# Altium PCB PCB1.PcbDoc
Units mm, origin at the board's own origin, x right, y up, seen from the top; angles counter-clockwise.
Board outline 80 x 36 mm, 2 copper layers (Top Layer, Bottom Layer), stack 1.67 mm thick; 29 components, 29 nets, 124 pads, 103 vias.
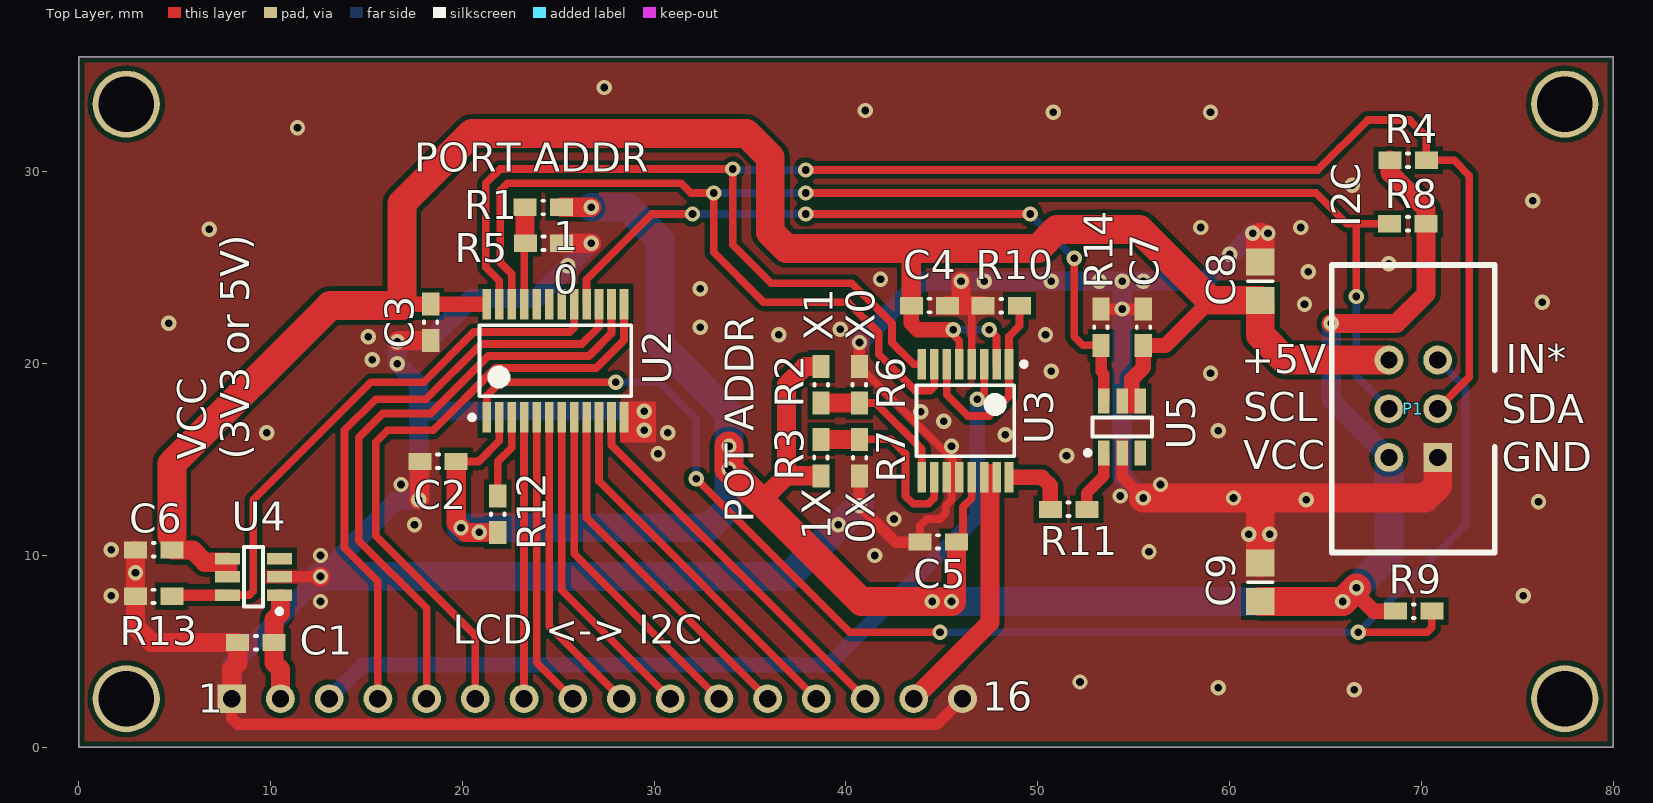
[diagram p0: Top Layer view]
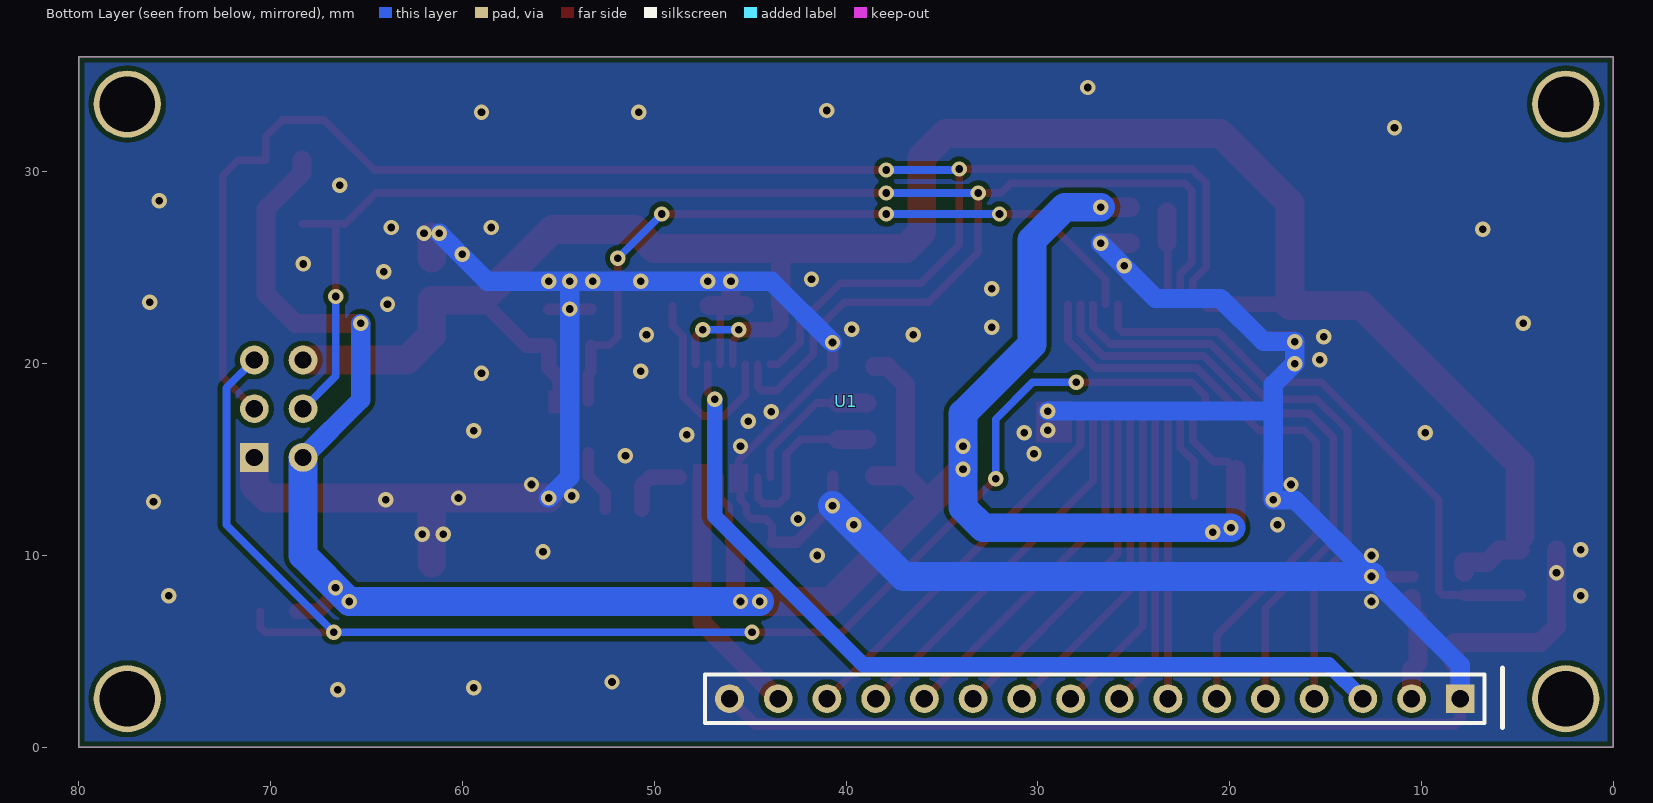
[diagram p1: Bottom Layer view, seen from below]

## Layer stack, top to bottom
Top Solder: solder mask 0.01, Solder Resist, Dk 3.5
Top Layer: signal copper 0.035
Dielectric 1: core 1.6, FR-4, Dk 4.2
Bottom Layer: signal copper 0.035
Bottom Solder: solder mask 0.01, Solder Resist, Dk 3.5

## Board outline
0,0 80,0 80,36 0,36

## Design rules (kind name [scope] priority, off if disabled: settings)
Clearance Clearance_1 [InNamedPolygon('GND_L01_P000') vs not InNet('GND')] p1: gap=0.254
Clearance Clearance_2 [InNamedPolygon('GND_L02_P001') vs not InNet('GND')] p2: gap=0.254
Clearance [All] p3: gap=0.178
DiffPairsRouting [All] p1: maxlimit=10 minlimit=0.178 mostfreqgap=0.5 toplayer_minwidth=0.178 toplayer_maxwidth=10 toplayer_prefwidth=0.5 bottomlayer_minwidth=0.178 bottomlayer_maxwidth=10 bottomlayer_prefwidth=0.5 maxuncoupledlength=12.7
HoleSize [All] p1: absolutevalues=TRUE maxlimit=10 minlimit=0.4 maxpercent=80.000 minpercent=20.000
HoleToHoleClearance [All] p1: gap=0 allowstackedmicrovias=TRUE
MinimumSolderMaskSliver [All] p1: minsoldermaskwidth=0
PlaneConnect [All] p1: planeconnectstyle=Direct reliefexpansion=0.508 reliefentries=4 reliefconductorwidth=0.254 reliefairgap=0.254
PolygonConnect [All] p1: connectstyle=Direct reliefconductorwidth=0.254 reliefentries=4 polygonreliefangle="90 Angle" airgapwidth=0.254
RoutingVias [All] p1: holewidth=1 width=2 viastyle="Through Hole" minholewidth=0.4 minwidth=0.8 maxholewidth=0.6 maxwidth=1.2
SilkToSilkClearance [All] p1: silktosilkclearance=0
SilkToSolderMaskClearance [IsPad] p1: minsilkscreentomaskgap=0 clearancetoexposedcopper=FALSE
SolderMaskExpansion [All] p1: expansion=0.1
Width [All] p1: maxlimit=10 minlimit=0.203 preferedwidth=0.5
23 further rules are at their usual default settings.

## Components (designator, comment, footprint, x,y, rotation, side; value= is the part's Value field where it differs from the comment)
C1 "0603" 0603_HandSoldering 9.24,5.459 r0 top locked
C2 "0603" 0603_HandSoldering 18.725,14.9 r180 top locked
C3 "0603" 0603_HandSoldering 18.35,22.15 r270 top locked
C4 "0603" 0603_HandSoldering 44.35,23.025 r180 top locked
C5 "0603" 0603_HandSoldering 44.8,10.7 r180 top locked
C6 "0603" 0603_HandSoldering 3.906,10.285 r180 top locked
C7 "0603" 0603_HandSoldering 55.5,21.9 r90 top locked
C8 "0805" 0805 61.6,24.3 r270 top locked
C9 "0805" 0805 61.6,8.6 r270 top locked
P1 "LCD I2C" IDC6 69.575,17.65 r90 top locked
R1 "0603" 0603_HandSoldering 24.225,28.15 r0 top locked
R2 "0603" 0603_HandSoldering 38.7,18.9 r90 top locked
R3 "0603" 0603_HandSoldering 38.7,15.1 r270 top locked
R4 "0603" 0603_HandSoldering 69.3,30.6 r180 top locked
R5 "0603" 0603_HandSoldering 24.225,26.275 r180 top locked
R6 "0603" 0603_HandSoldering 40.7,18.9 r270 top locked
R7 "0603" 0603_HandSoldering 40.7,15.1 r90 top locked
R8 "0603" 0603_HandSoldering 69.3,27.3 r0 top locked
R9 "0603" 0603_HandSoldering 69.6,7.1 r0 top locked
R10 "0603" 0603_HandSoldering 48.1,23.025 r0 top locked
R11 "0603" 0603_HandSoldering 51.6,12.4 r180 top locked
R12 "0603" 0603_HandSoldering 21.85,12.15 r270 top locked
R13 "0603" 0603_HandSoldering 3.906,7.872 r0 top locked
R14 "0603" 0603_HandSoldering 53.3,21.9 r270 top locked
U1 "LDC" LCD_2X16_BOARD 39.974,18.032 r0 bottom locked
U2 "PCAL6416A" PCAL6416A_TSOP24 24.85,20.15 r90 top locked
U3 "AD5282" AD5282_TSSOP16 46.225,17.025 r270 top locked
U4 "TPS22860" TPS22860_SOT23_6 9.113,8.888 r180 top locked
U5 "TPS22860" TPS22860_SOT23_6 54.4,16.7 r90 top locked

## Footprints (in the part's own frame and the unit in brackets; to place one, negate y for a bottom-side part, rotate by r counter-clockwise, add the part's x,y. Pads: shape width x height; smd on the part's side, far side on the other; paste and mask are expansions set on the pad)
0603_HandSoldering [mm] "Chip Resistor, 2-Leads, Body 1.6x0.8mm, IPC Medium Density"
  rect 1.2x0.9 smd: 1(-0.954,0) 2(0.946,0)
  silkscreen extent -0.05,-0.36 0.05,0.34, body extent -0.85,-0.48 0.85,0.47, height 0.6
0805 [mm] "Chip Resistor, Body 2.0x1.2mm, IPC Low Density"
  rect 1.4x1.5 smd: 1(-1,0) 2(1,0)
  silkscreen extent 0,-0.65 0,0.65, body extent -1.07,-0.7 1.07,0.7, height 0.7
AD5282_TSSOP16 [mm] "TSOP, 16-Leads, Body 5,00x4,40mm, Pitch 0,65mm, IPC Medium Density"
  rect 1.6x0.45 smd: 1(-2.95,2.275) 2(-2.95,1.625) 3(-2.95,0.975) 4(-2.95,0.325) 5(-2.95,-0.325) 6(-2.95,-0.975) 7(-2.95,-1.625) 8(-2.95,-2.275) 9(2.95,-2.275) 10(2.95,-1.625) 11(2.95,-0.975) 12(2.95,-0.325) 13(2.95,0.325) 14(2.95,0.975) 15(2.95,1.625) 16(2.95,2.275)
  silkscreen extent -3.07,-2.55 1.85,3.18, body extent -2.25,-2.55 2.25,2.55, height 1.2
IDC6 [mm] "Header; 3x2 Position"
  rect 1.5x1.5 hole 0.9: 1(-2.54,-1.27)
  round 1.5 hole 0.9: 2(-2.54,1.27) 3(0,-1.27) 4(0,1.27) 5(2.54,-1.27) 6(2.54,1.27)
  silkscreen extent -7.5,-4.25 7.5,4.25, body extent -7.62,-4.47 7.62,4.98, height 9.1
LCD_2X16_BOARD [mm] "2X16 LCD PCB"
  round 3.5 hole 2.9: 0(-37.5,-15.5) 0(-37.5,15.5) 0(37.5,-15.5) 0(37.5,15.5)
  rect 1.5x1.5 hole 0.9: 1(-32,15.5)
  round 1.5 hole 0.9: 2(-29.46,15.5) 3(-26.92,15.5) 4(-24.38,15.5) 5(-21.84,15.5) 6(-19.3,15.5) 7(-16.76,15.5) 8(-14.22,15.5) 9(-11.68,15.5) 10(-9.14,15.5) 11(-6.6,15.5) 12(-4.06,15.5) 13(-1.52,15.5) 14(1.02,15.5) 15(3.56,15.5) 16(6.1,15.5)
  silkscreen extent -34.2,13.9 7.37,17, body extent -40,-18 40,18, height 22
PCAL6416A_TSOP24 [mm] "TSOP, 24-Leads, Body 7,80x4,40mm, Pitch 0,65mm, IPC Medium Density"
  rect 1.6x0.45 smd: 1(-2.95,3.575) 2(-2.95,2.925) 3(-2.95,2.275) 4(-2.95,1.625) 5(-2.95,0.975) 6(-2.95,0.325) 7(-2.95,-0.325) 8(-2.95,-0.975) 9(-2.95,-1.625) 10(-2.95,-2.275) 11(-2.95,-2.925) 12(-2.95,-3.575) 13(2.95,-3.575) 14(2.95,-2.925) 15(2.95,-2.275) 16(2.95,-1.625) 17(2.95,-0.975) 18(2.95,-0.325) 19(2.95,0.325) 20(2.95,0.975) 21(2.95,1.625) 22(2.95,2.275) 23(2.95,2.925) 24(2.95,3.575)
  silkscreen extent -3.07,-3.95 1.85,4.47, body extent -2.25,-3.95 2.25,3.95, height 1.1
TPS22860_SOT23_6 [mm] "SOT23, 6-Leads, Body 2,90x2,80mm, Pitch 0,95mm, IPC Medium Density"
  rect 1.3x0.6 smd: 1(-1.35,0.95) 2(-1.35,0) 3(-1.35,-0.95) 4(1.35,-0.95) 5(1.35,0) 6(1.35,0.95)
  silkscreen extent -1.48,-1.55 0.5,1.92, body extent -0.87,-1.52 0.87,1.53, height 1.45

## Part data
C1 C2 C3 C4 C5 C6 C7 C8 C9: library part Capacitor, "Capacitor"
P1: library part LCD_I2C, "LCD I2C interface"
R1 R2 R3 R4 R5 R6 R7 R8 R9 R10 R11 R12 R13 R14: library part Resistor, "Resistor"
U1: library part LCD_2x16_Board, "2x16 LCD PCB"
U2: "I2C to parallel converter"
U3: "Dual digital potentiometer"
U4 U5: "Power switch"

## Via types
v1: diameter 0.8, hole 0.4, Top Layer to Bottom Layer, tented both sides, 103 vias

## Nets (pads, with @x,y where several pads share a name; then routed paths per layer and width w, separated by ;. In a path a pad name is that pad's centre, name@x,y a point inside that pad or via, vN(x,y) a via of type N, cw(c..) or ccw(c..) an arc to the next point about the centre after c; other vN are vias at no path point)
+5V: C3.1 C4.2 C6.1 C7.1 C8.2 P1.6 U2.24 U3.2 U3.5 U4.4 U4.5 U5.4 U5.5 | length 113.8
  Top Layer w0.4: v1(45.6,21.775) 45.6,21.5 45.9,21.2 U3.5 ; v1(47.475,21.775) 47.85,21.4 U3.2
  Top Layer w0.8: 16.85,23.025 16.929,23.104 C3.1 ; C3.1@18.35,23.1 U2.24@21.1,23.1 ; C4.2@43.404,22.775 43.404,22.096 43.725,21.775 v1(45.6,21.775) ; 54.9,18 54.9,19.2 55.5,19.8 C7.1 56.646,20.946 59,23.3
  Top Layer w1: C6.1 5.938,10.285 6.573,9.65 7.763,9.65 U4.5@7.763,9.142 ; C4.2 43.404,25.896
  Top Layer w1.5: 4.86,11.025 4.86,14.785 13.1,23.025 16.85,23.025 16.85,28.35 20.5,32 34.8,32 36.05,30.75 36.05,26.85 36.9,26 50,26 51,27 55.3,27 59,23.3 C8.2 61.6,21.5 62.91,20.19 P1.6
  Bottom Layer w0.4: v1(45.6,21.775) v1(47.475,21.775)
CONTRAST: U1.3 U3.3 | length 45.8
  Top Layer w0.4: v1(46.85,18.15) 47.2,18.5 U3.3
  Bottom Layer w0.8: U1.3 14.822,4.3 39.1,4.3 46.85,12.05 v1(46.85,18.15)
DATA0: U1.7 U2.4 | length 29.3
  Top Layer w0.4: U1.7 23.214,17.2 U1.7
DATA1: U1.8 U2.5 | length 15.4
  Top Layer w0.4: U2.5 23.875,4.411 U1.8
DATA2: U1.9 U2.6 | length 16.2
  Top Layer w0.4: U2.6 24.525,6.301 U1.9
DATA3: U1.10 U2.7 | length 17
  Top Layer w0.4: U2.7 25.175,8.191 U1.10
DATA4: U1.11 U2.8 | length 17.8
  Top Layer w0.4: U2.8 25.825,10.081 U1.11
DATA5: U1.12 U2.9 | length 18.6
  Top Layer w0.4: U2.9 26.475,11.971 U1.12
DATA6: U1.13 U2.10 | length 19.4
  Top Layer w0.4: U2.10 27.125,13.861 U1.13
DATA7: U1.14 U2.11 | length 20.1
  Top Layer w0.4: U2.11 27.775,15.751 U1.14
ENABLE: U1.6 U2.13 | length 32.6
  Top Layer w0.4: U1.6 20.674,5.826 15.475,11.025 15.475,15.9 16.1,16.525 18.475,16.525 21.725,19.775 26.975,19.775 28.425,21.225 U2.13
GND: C1.1 C2.2 C3.2 C4.1 C5.2 C6.2 C7.2 C8.1 C9.1 P1.1 R5.1 R6.1 R7.1 R10.1 R13.1 R14.1 U1.1 U1.16 U2.12 U3.4 U3.11 U3.12 U4.2 U5.2 | length 223
  Top Layer w0.4: R6.1 45.6,14.954 45.6,14.5 ; C5.2 43.854,11.554 44.2,11.9 44.9,11.9 45.2,12.2 45.2,12.6 45.5,12.9 45.5,14.1 ; U3.4 R10.1@46.55,23.025
  Top Layer w0.6: U1.1 7.974,1.526 8.3,1.2 44.742,1.2 U1.16 ; U4.2 v1@12.588,8.888 ; R7.1 v1(40.7,12.6) 42.6,10.7 C5.2 ; R6.1 v1(40.7,21.1) ; R14.1 53.308,22.846 v1(54.4,22.846) C7.2 ; U5.2 54.4,14.1 v1(55.5,13)
  Top Layer w1: C6.2 2.96,6.278 3.779,5.459 C1.1 8.286,4.378 7.974,4.066 U1.1 ; v1@12.588,8.888 v1(12.6,8.9) ; v1(16.6,21.15) 16.654,21.204 C3.2@18.1,21.204 ; v1(17.725,12.9) 17.779,12.954 C2.2@17.779,14.65 ; R5.1 v1(26.725,26.275) ; C4.1 46.225,23.025 ; v1(46,24.3) 46,23.25 46.225,23.025 ; R10.1 46.55,23.025 46.225,23.025
  Top Layer w1.5: v1(55.5,13) 61.6,13 ; C9.1 61.6,13 ; C8.1@61.6,25.5 61.6,26.6 ; P1.1 70.845,13.645 70.2,13 61.6,13
  Bottom Layer w1: U1.1 7.974,4.274 v1(12.6,8.9) 16.6,12.9 v1(17.725,12.9) 17.725,18.9 16.6,20.025 v1(16.6,21.15) 18.225,21.15 20.475,23.4 23.85,23.4 v1(26.725,26.275) ; 17.725,17.525 v1(29.475,17.525) ; v1(40.7,21.1) 43.9,24.3 v1(46,24.3) 58.7,24.3 v1(61.2,26.8) ; v1(54.4,24.3) v1(54.4,22.846) 54.4,14.1 v1(55.5,13)
  Bottom Layer w1.5: v1(12.6,8.9) 37,8.9 v1(40.7,12.6)
  other v1: 66.5,3 59.4,3.1 52.2,3.4 12.6,7.6 1.7,7.9 75.3,7.9 2.96,9.1 12.6,10 41.5,10 55.8,10.2 1.7,10.3 61,11.1 62.1,11.1 17.5,11.6 39.6,11.6 42.5,11.9 76.1,12.8 64,12.9 60.2,13 54.3,13.1 16.8,13.7 56.4,13.7 51.5,15.2 30.2,15.3 45.5,15.7 48.3,16.3 9.8,16.4 30.7,16.4 59.4,16.5 29.475,16.525 45.1,17 43.9,17.5 59,19.5 50.7,19.6 16.6,20 15.3,20.2 15.1,21.4 36.5,21.5 50.4,21.5 39.7,21.8 32.4,21.9 4.7,22.1 63.9,23.1 76.3,23.2 32.4,23.9 47.2,24.3 50.7,24.3 53.2,24.3 55.5,24.3 41.8,24.4 64.1,24.8 25.5,25.1 68.3,25.2 60,25.7 62,26.8 6.8,27 58.5,27.1 63.7,27.1 75.8,28.5 66.4,29.3 11.4,32.3 50.8,33.1 59,33.1 41,33.2 27.4,34.4
I2C_SCL: P1.4 R8.1 U2.22 U3.7 | length 83.4
  Top Layer w0.4: U2.22 22.575,24.675 21.975,25.275 21.975,29.025 22.35,29.4 31.4,29.4 31.9,28.9 v1(33.1,28.9) 33.1,25.8 35.7,23.2 40.1,23.2 41.7,21.6 41.7,20.5 43.6,18.6 44.4,18.6 44.6,18.8 U3.7 ; v1(37.9,28.9) 64.5,28.9 66.1,27.3 66.6,27.3 ; v1(66.6,23.5) 66.6,27.3 ; R8.1 66.6,27.3
  Bottom Layer w0.4: v1(33.1,28.9) v1(37.9,28.9) ; v1(66.6,23.5) 66.6,19.355 P1.4
I2C_SDA: P1.3 R4.1 U2.23 U3.8 | length 91
  Top Layer w0.4: U2.23 21.925,24.325 21.225,25.025 21.225,29.4 21.975,30.15 v1(34.1,30.15) 34.1,26.2 36.1,24.2 40.3,24.2 42.4,22.1 42.4,21.1 43.525,19.975 U3.8 ; v1(37.9,30.1) 64.6,30.1 67.2,32.7 69.4,32.7 70.254,31.846 R4.1 71.7,30.6 72.5,29.8 72.5,19.305 P1.3
  Bottom Layer w0.4: v1(34.1,30.15) 34.15,30.1 v1(37.9,30.1)
INTERRUPT*: P1.5 R9.2 U2.1 | length 76
  Top Layer w0.4: U2.1 21.275,18.325 21.975,19.025 v1(28,19.025) ; v1(32.2,14) 40.2,6 v1(44.9,6) ; v1(66.7,6) 70.3,6 70.546,6.246 R9.2
  Bottom Layer w0.4: v1(28,19.025) 30.275,19.025 32.2,17.1 v1(32.2,14) ; v1(44.9,6) v1(66.7,6) 72.3,11.6 72.3,18.735 P1.5
LCD_ON: R13.2 U2.17 U4.6 | length 30.8
  Top Layer w0.4: U4.6 8.888,7.938 9.1,8.15 9.1,12.9 15.225,19.025 17.975,19.025 20.6,21.65 25.6,21.65 25.825,21.875 U2.17
  Top Layer w0.6: R13.2@4.852,7.938 U4.6
LED: U1.15 U3.14 U3.15 | length 13.2
  Top Layer w1: U1.15 47.5,6.498 47.5,14.1
LED_ON: R14.2 U2.16 U5.6 | length 37.7
  Top Layer w0.4: U2.16 26.475,24.4 29.875,27.8 v1(32,27.8) ; v1(37.9,27.8) v1(49.6,27.8) ; v1(51.9,25.5) 51.9,21.4 52.346,20.954 R14.2
  Top Layer w0.6: R14.2 53.3,19.6 53.45,19.45 U5.6
  Bottom Layer w0.4: v1(32,27.8) v1(37.9,27.8) ; v1(49.6,27.8) v1(51.9,25.5)
LED_SW: R11.1 U5.1 | length 3.3
  Top Layer w0.6: R11.1 52.554,13.254 53.45,14.15 U5.1
NetR10_2: R10.2 U3.1 U3.6 | length 10.7
  Top Layer w0.4: U3.6 45.25,18.375 46.35,17.275 47.475,17.275 48.5,18.3 U3.1 48.5,21.425 49.046,21.971 R10.2
NetR11_2: R11.2 U3.16 | length 3.4
  Top Layer w0.8: U3.16@48.7,14.075 50.225,14.075 50.654,13.646 R11.2
NetR12_1: R12.1 U2.3 | length 4.4
  Top Layer w0.4: R12.1 21.85,14.9 22.575,15.625 U2.3
PORT_ADDR: R1.1 R5.2 U2.21 | length 4.8
  Top Layer w0.4: U2.21 R5.2@23.225,26.275
  Top Layer w1: R5.2@23.271,26.321 R1.1@23.271,27.9
POT_ADDR0: R2.1 R6.2 U3.9 | length 7.2
  Top Layer w0.4: R6.2@40.7,17.946 41.554,17.946 43.95,15.55 U3.9
  Top Layer w1: R2.1@38.9,17.954 R6.2@40.4,17.954
POT_ADDR1: R3.1 R7.2 U3.10 | length 9.3
  Top Layer w0.4: R7.2@40.7,16.054 42.346,16.054 43.1,15.3 43.1,13.1 43.5,12.7 44.3,12.7 44.6,13 U3.10
  Top Layer w1: R3.1@38.9,16.046 R7.2@40.4,16.046
RD_WR: U1.5 U2.14 | length 32
  Top Layer w0.4: U1.5 18.134,7.241 14.6,10.775 14.6,16.15 15.85,17.4 18.35,17.4 21.35,20.4 26.6,20.4 27.775,21.575 U2.14
REG_SEL: U1.4 U2.15 | length 31.4
  Top Layer w0.4: U1.4 15.594,8.656 13.85,10.4 13.85,16.525 15.475,18.15 18.1,18.15 20.975,21.025 26.225,21.025 27.125,21.925 U2.15
VCC_I2C: C2.1 C5.1 C9.2 P1.2 R1.2 R2.2 R3.2 R4.2 R8.2 R9.1 R12.2 U2.2 U3.13 | length 135.6
  Top Layer w0.4: C2.1@20.1,14.9 20.85,14.9 21.925,15.975 U2.2 ; C5.1@46.1,10.7 46.1,12.525 46.55,12.975 U3.13
  Top Layer w0.8: 66.7,7.9 67.5,7.1 R9.1
  Top Layer w1: C2.1@19.679,14.479 19.679,11.696 v1(19.925,11.45) 20.171,11.204 R12.2@21.6,11.204 ; R1.2 v1(26.725,28.15) ; 35.646,12.9 36.9,14.154 ; R3.2@38.5,14.154 36.9,14.154 ; R2.2@38.5,19.846 37.846,19.846 36.9,18.9 36.9,14.154 ; v1@45.754,7.6 C5.1 ; v1(65.3,22.1) 68.7,22.1 70.246,23.646 R8.2 70.246,28.054 68.354,29.946 R4.2
  Top Layer w1.5: v1(33.9,15.7) v1(33.9,14.5) 40.8,7.6 v1(45.5,7.6) ; C9.2 v1(65.9,7.6) v1(66.616,8.316)
  Bottom Layer w1: v1(65.3,22.1) 65.3,18.115 P1.2
  Bottom Layer w1.5: v1(19.925,11.45) 32.85,11.45 33.9,12.5 v1(33.9,14.5) 33.9,17.4 30.3,21 30.3,26.45 28.6,28.15 v1(26.725,28.15) ; v1(44.5,7.6) v1(65.9,7.6) 68.305,10.005 P1.2
  other v1: 20.885,11.204
VCC_LCD: C1.2 U1.2 U4.1 | length 5.5
  Top Layer w1: U4.1@10.51,7.745 10.51,6.983 10.186,6.659 C1.2 10.186,4.386 10.514,4.058 U1.2
pads on no net: U1.0 U2.18 U2.19 U2.20 U4.3 U5.3

## Polygon pours and split planes (outlines as drawn)
GND on Top Layer "GND_L01_P000" (solid, remove dead copper, pour order 0): 0,0 80,0 80,36 0,36
GND on Bottom Layer "GND_L02_P001" (solid, pour order 1): 0,0 80,0 80,36 0,36

## Keep-outs
Keep-Out Layer:
  the board outline again, w0.1

## Other copper
Top Layer:
  rectangle net +5V: 54.2,17.4 55.5,18.6
  rectangle net GND: 45.1,13.275 46.1,14.775
  rectangle net LED: 47.1,13.4 47.975,14.775
  rectangle net GND: 28.225,15.9 30.1,18.025

## Silkscreen, mask and mechanical layers (free items; w line width, h text height)
Top Overlay:
  text "PORT ADDR" at 17.5,30 h1.5
  text "I2C" at 66.8,27.1 h1.5 r90
  text "1" at 24.725,25.9 h1.5
  text "0" at 24.725,23.65 h1.5
  text "X1" at 39.3,21.2 h1.5 r90
  text "X0" at 41.5,21.2 h1.5 r90
  text "+5V" at 60.6,19.5 h1.5
  text "IN*" at 74.4,19.5 h1.5
  text "SCL" at 60.7,17 h1.5
  text "SDA" at 74.2,16.9 h1.5
  text "VCC / (3V3 or 5V)" at 8.9,15 h1.5 r90
  text "VCC" at 60.7,14.5 h1.5
  text "GND" at 74.2,14.4 h1.5
  text "POT ADDR" at 35.2,11.7 h1.5 r90
  text "1X" at 39.2,10.8 h1.5 r90
  text "0X" at 41.5,10.6 h1.5 r90
  text "LCD <-> I2C" at 19.5,5.4 h1.5
  text "16" at 47.1,1.9 h1.5
  text "1" at 6.2,1.8 h1.5